# Altium PCB Amber_Main_Board.PcbDoc (part 1 of 2)
Units mm, origin at the board's own origin, x right, y up, seen from the top; angles counter-clockwise.
Board outline 90 x 23 mm, 4 copper layers (Top Layer, Power, Ground, Bottom Layer), stack 1.142 mm thick; 223 components, 97 nets, 585 pads, 378 vias.
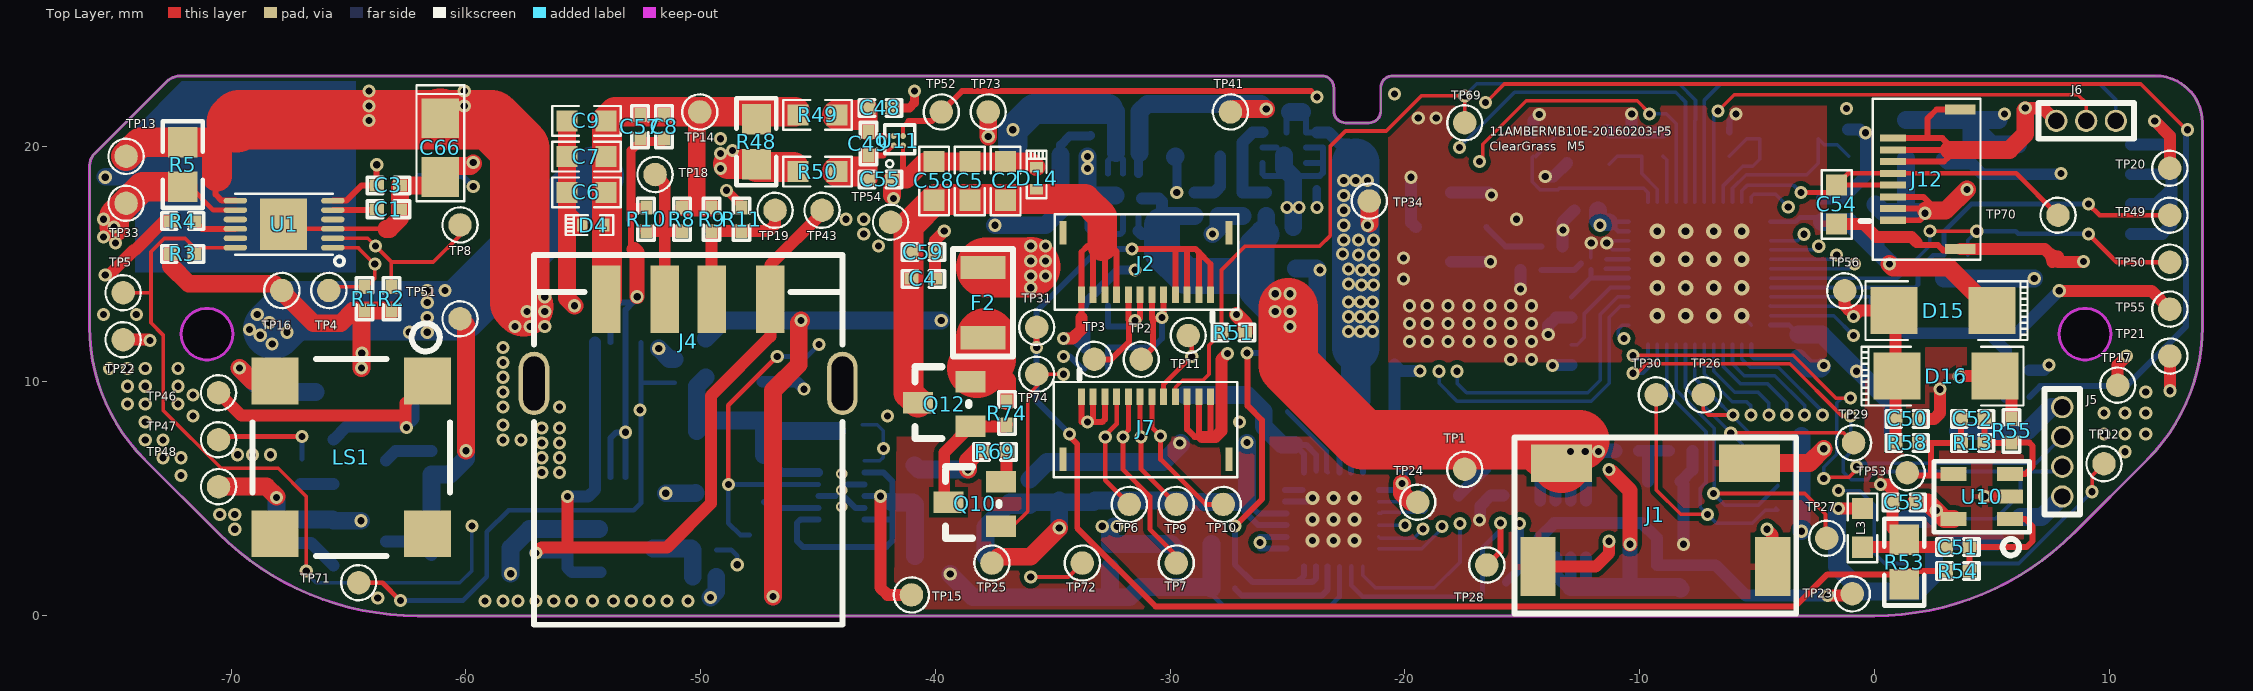
[diagram p0: Top Layer view]
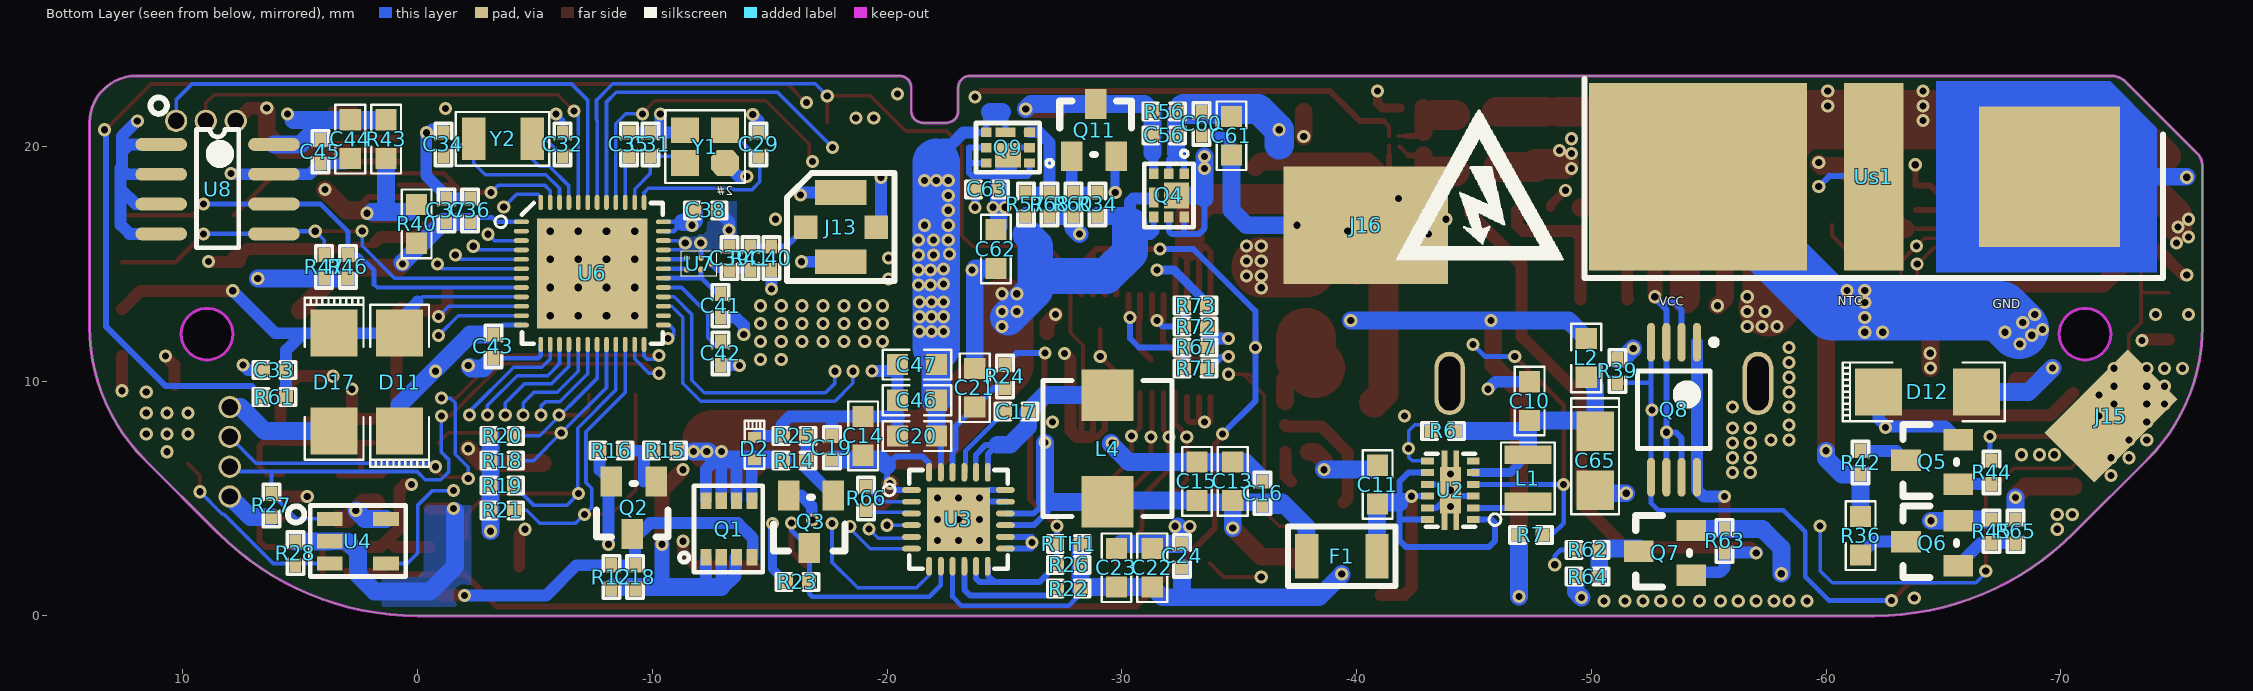
[diagram p1: Bottom Layer view, seen from below]
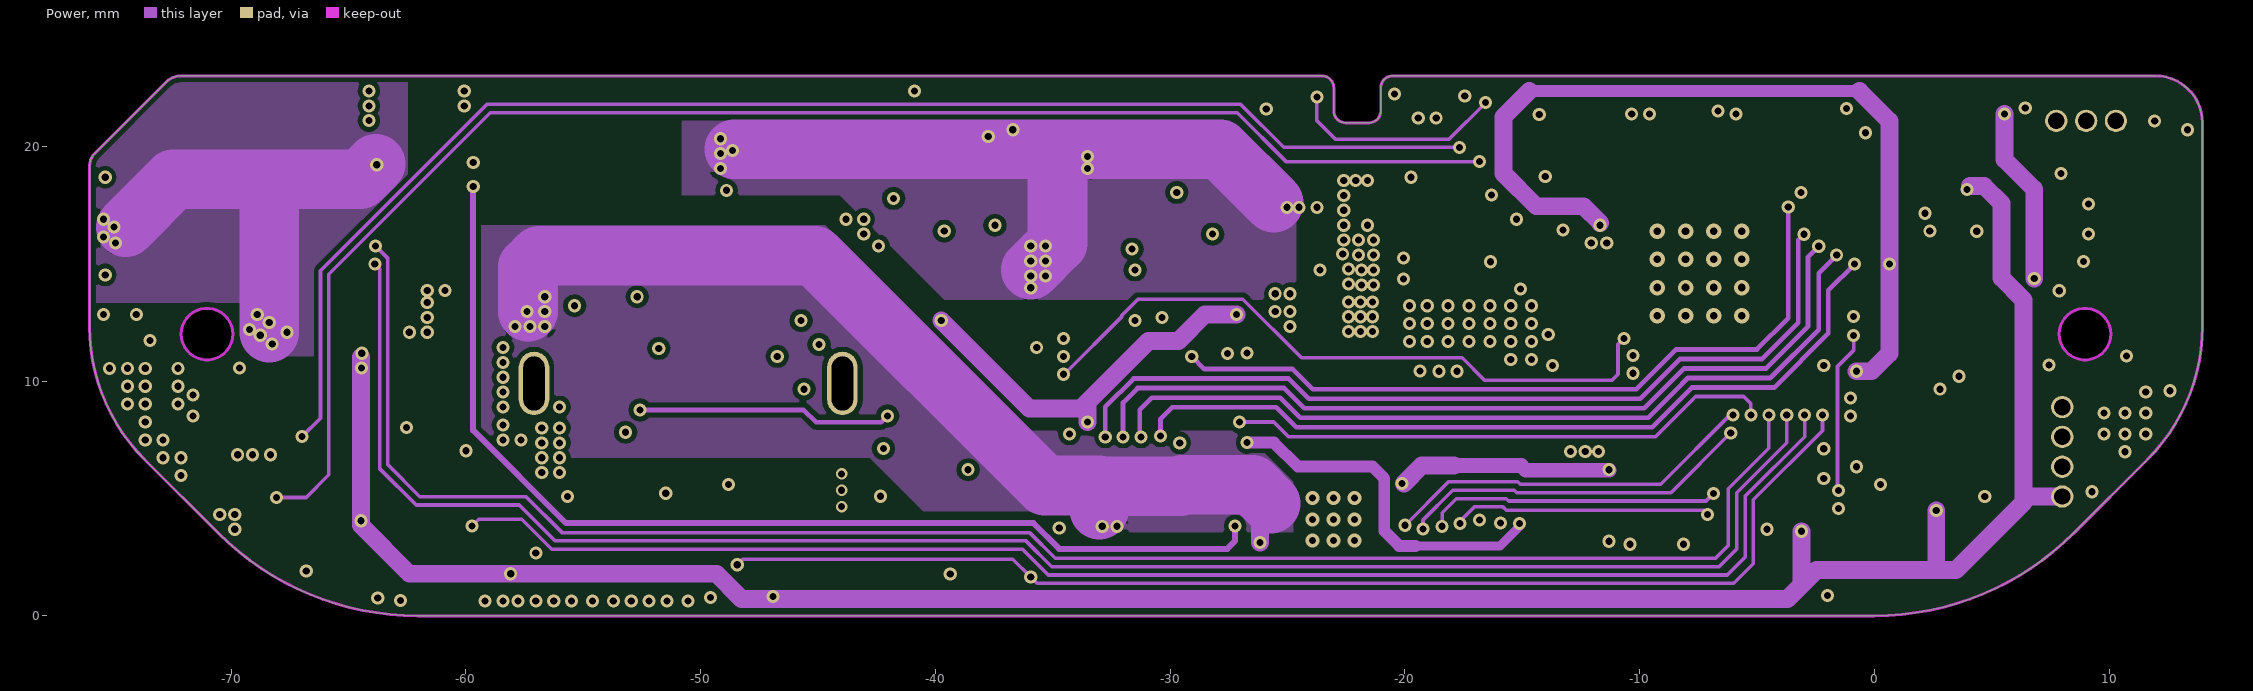
[diagram p2: Power]
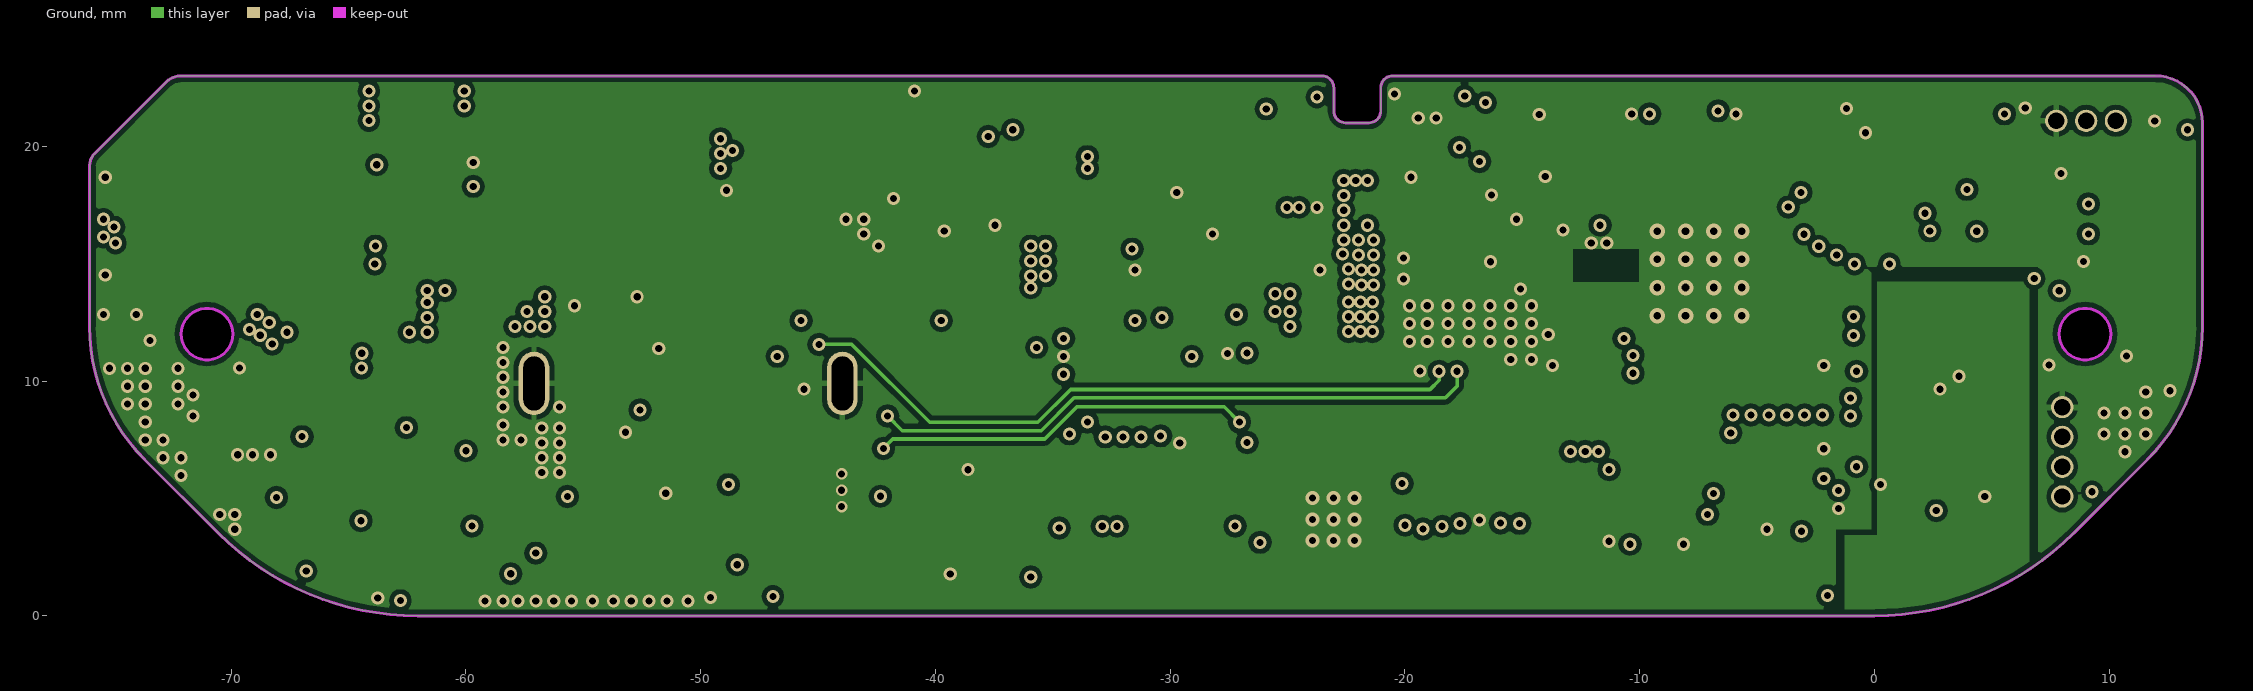
[diagram p3: Ground]
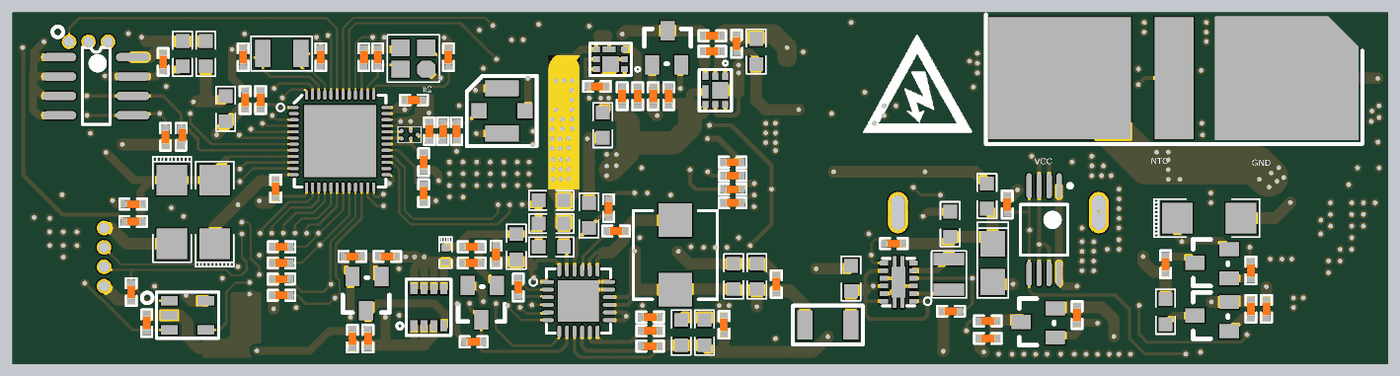
[diagram p5: 3D render of the assembled board from below, using the file's embedded part models]

## Layer stack, top to bottom
Top Layer: signal copper 0.0356
Dielectric: core 0.36, FR-4, Dk 4.8
Power: signal copper 0.0356
Dielectric: prepreg 0.32, FR-4, Dk 4.8
Ground: signal copper 0.0356
Dielectric: core 0.32, FR-4, Dk 4.8
Bottom Layer: signal copper 0.0356

## Board outline
-73.687,6.657 cw(c-68.03,12.314) -76.03,12.314 -76.03,19.177 cw(c-75.313,19.177) -75.82,19.684 -72.765,22.739 cw(c-72.136,22.111) -72.136,23 -23.53,23 cw(c-23.539,22.491) -23.03,22.482 -23.03,22.5 -23.03,21.5 ccw(c-22.53,21.5) -22.53,21 -21.53,21 ccw(c-21.53,21.5) -21.03,21.5 -21.03,22.5 cw(c-20.521,22.491) -20.512,23 11.97,23 cw(c11.97,21) 13.97,21 13.97,12.314 13.97,12.313 cw(c5.97,12.313) 11.627,6.657 8.485,3.515 cw(c0,12) 0,0 -62.06,0 cw(c-62.06,12) -70.545,3.515
cut-out: -71.03,10.9 cw(c-71.03,12) -72.13,12 cw(c-71.03,12) -71.03,13.1 cw(c-71.03,12) -69.93,12 cw(c-71.03,12)
cut-out: 8.97,10.9 cw(c8.97,12) 7.87,12 cw(c8.97,12) 8.97,13.1 cw(c8.97,12) 10.07,12 cw(c8.97,12)
cut-out: -71.03,10.9 cw(c-71.03,12) -72.13,12 cw(c-71.03,12) -71.03,13.1 cw(c-71.03,12) -69.93,12 cw(c-71.03,12)

## Design rules (kind name [scope] priority, off if disabled: settings)
Clearance [All] p1: gap=0.203
HoleSize [All] p1: absolutevalues=TRUE maxlimit=5.08 minlimit=0.025 maxpercent=80.000 minpercent=20.000
HoleToHoleClearance [All] p1 off: gap=0.254 allowstackedmicrovias=TRUE
MinimumSolderMaskSliver [All] p1: minsoldermaskwidth=0
PolygonConnect PolygonConnect_1 [IsVia] p1: connectstyle=Direct reliefconductorwidth=0.254 reliefentries=4 polygonreliefangle="90 Angle"
PolygonConnect [All] p2: connectstyle=Relief reliefconductorwidth=0.254 reliefentries=4 polygonreliefangle="90 Angle"
RoutingVias [All] p1: holewidth=0.711 width=1.27 viastyle="Through Hole" minholewidth=0.711 minwidth=1.27 maxholewidth=0.711 maxwidth=1.27
SilkToSilkClearance [All] p1: silktosilkclearance=0
SilkscreenOverComponentPads [All] p1: minsilkscreentomaskgap=0
SolderMaskExpansion [All] p1: expansion=0.102
Width [All] p1: maxlimit=5.08 minlimit=0.152 preferedwidth=0.254
23 further rules are at their usual default settings.

## Classes and differential pairs
component class "Breath LED,Temp,Touch key,Motor": C48 C49 C51 C52 C53 C54 C55 D12 F2 J7 J12 J15 J16 LS1 Q5 Q6 Q10 Q12 R13 R36 R42 R44 R45 R48 R49 R50 R51 R53 R54 R55 R65 R69 R74 TP6 TP7 TP9 TP10 TP11 TP46 TP47 TP48 TP51 TP52 TP53 TP69 TP70 TP74 U10 U11
component class "Charge,Discharge,Battery Monitor,DC DC BUCK": C1 C2 C3 C4 C5 C6 C7 C8 C9 C57 C58 C59 C65 C66 D2 D4 D14 J1 J2 J4 L1 L2 Q7 Q8 R1 R2 R3 R4 R5 R6 R7 R8 R9 R10 R11 R39 R62 R63 R64 R67 R71 R72 R73 TP1 TP2 TP3 TP4 TP5 TP8 TP13 TP14 TP15 TP16 TP17 TP18 TP19 TP20 TP21 TP22 TP31 TP33 TP43 TP54 TP71 TP72 U1 U2 Us1
component class "BLE MCU,Watch Dog and Reset,EEPROM,Buzzer": A1 C28 C29 C31 C32 C33 C34 C35 C36 C37 C38 C39 C40 C41 C42 C43 C44 C45 C50 D9 D11 D15 D16 D17 J5 J6 J13 L3 R27 R28 R40 R41 R43 R46 R47 R58 R61 TP12 TP49 TP50 TP55 TP56 U4 U6 U7 U8 Y1 Y2
component class "Management of Charging,Discharging,Tri-axis angle sensor": C13 C14 C15 C16 C17 C18 C19 C20 C21 C22 C23 C24 C46 C47 F1 L4 Q1 Q2 Q3 R9 R11 R15 R16 R18 R19 R20 R21 R22 R23 R24 R25 R26 R66 RTH1 Text TP23 TP24 TP25 TP26 TP27 TP28 TP29 TP30 TP34 U3
component class WindCharger: C56 C60 C61 C62 C63 Q4 Q9 Q11 R34 R56 R57 R60 R68 TP41 TP73

## Components (designator, comment, footprint, x,y, rotation, side; value= is the part's Value field where it differs from the comment)
C1 "0.47uF/10V/X7R/10%" 0402C -63.3,17.317 r0 top
C2 "22uF/10V/X5R/20%" 0603C -37.011,18.523 r90 top
C3 "1uF/10V/X7R/10%" 0402C -63.3,18.333 r0 top
C4 "0.1uF/10V/X7R/10%" 0402C -40.513,14.351 r0 top
C5 "22uF/10V/X5R/20%" 0603C -38.535,18.523 r90 top
C6 "22uF/10V/X5R/20%" 0603C -54.864,18.034 r180 top
C7 "22uF/10V/X5R/20%" 0603C -54.864,19.558 r180 top
C8 "0.1uF/10V/X7R/10%" 0402C -51.562,20.828 r270 top
C9 "22uF/10V/X5R/20%" 0603C -54.864,21.082 r180 top
C10 "10uF/10V/X7R/10%" 0603C -47.371,9.144 r90 bottom
C11 "10uF/10V/X7R/10%" 0603C -40.894,5.588 r90 bottom
C13 "10uF/10V/X7R/10%" 0603C -34.725,5.728 r90 bottom
C14 "10uF/10V/X7R/10%" 0603C -18.977,7.665 r90 bottom
C15 "10uF/10V/X7R/10%" 0603C -33.201,5.728 r90 bottom
C16 "0.1uF/10V/X7R/10%" 0402C -35.995,5.22 r90 bottom
C17 "47nF/10V/X7R/10%" 0402C -25.513,8.697 r0 bottom
C18 "1nF/10V/X7R/5%" 0402C -9.271,1.651 r270 bottom
C19 "1uF/10V/X7R/10%" 0402C -17.653,7.157 r90 bottom
C20 "22uF/10V/X5R/20%" 0603C -21.273,7.654 r0 bottom
C21 "4.7uF/10V/X7R/10%" 0603C -23.736,9.713 r90 bottom
C22 "22uF/10V/X5R/20%" 0603C -31.296,2.045 r270 bottom
C23 "22uF/10V/X5R/20%" 0603C -29.772,2.045 r270 bottom
C24 "0.1uF/10V/X7R/10%" 0402C -32.566,2.553 r270 bottom
C29 "12pF/16V/NPO/10%" 0402C -14.532,20.079 r270 bottom
C31 "12pF/16V/NPO/10%" 0402C -9.913,20.079 r270 bottom
C32 "12pF/16V/NPO/10%" 0402C -6.18,20.079 r270 bottom
C33 "0.1uF/10V/X7R/10%" 0402C 6.096,10.459 r0 bottom
C34 "12pF/16V/NPO/10%" 0402C -1.1,20.079 r270 bottom
C35 "0.1uF/10V/X7R/10%" 0402C -9.006,20.079 r270 bottom
C36 "0.1uF/10V/X7R/10%" 0402C -2.243,17.267 r270 bottom
C37 "1uF/10V/X7R/10%" 0402C -1.227,17.267 r270 bottom
C38 "1nF/10V/X7R/5%" 0402C -12.276,17.267 r0 bottom
C39 "1PF/10V/NPO/10%" 0402C -13.292,15.235 r90 bottom
C40 "DNM" 0402C -15.07,15.235 r270 bottom
C41 "2.2nF/10V/X7R/10%" 0402C -12.911,13.203 r90 bottom
C42 "47nF/10V/X7R/10%" 0402C -12.911,11.176 r90 bottom
C43 "0.1uF/10V/X7R/10%" 0402C -3.229,11.475 r90 bottom
C44 "10uF/10V/X7R/10%" 0603C 2.87,20.301 r270 bottom
C45 "0.1uF/10V/X7R/10%" 0402C 4.137,19.766 r270 bottom
C46 "22uF/10V/X5R/20%" 0603C -21.273,9.178 r0 bottom
C47 "22uF/10V/X5R/20%" 0603C -21.273,10.702 r0 bottom
C48 "0.1uF/10V/X7R/10%" 0402C -42.345,21.635 r180 top
C49 "1uF/10V/X7R/10%" 0402C -42.853,20.111 r270 top
C50 "0.1uF/10V/X7R/10%" 0402C 1.397,8.382 r0 top
C51 "1uF/10V/X7R/10%" 0402C 3.556,2.921 r0 top
C52 "1uF/10V/X7R/10%" 0402C 4.191,8.382 r180 top
C53 "1uF/10V/X7R/10%" 0402C 1.27,4.826 r0 top
C54 "10uF/10V/X7R/10%" 0603C -1.608,17.521 r270 top
C55 "0.1uF/10V/X7R/10%" 0402C -42.345,18.587 r0 top
C56 "1nF/10V/X7R/5%" 0402C -31.804,20.46 r180 bottom
C57 "0.1uF/10V/X7R/10%" 0402C -52.578,20.828 r270 top
C58 "22uF/10V/X5R/20%" 0603C -40.059,18.523 r90 top
C59 "0.1uF/10V/X7R/10%" 0402C -40.513,15.494 r0 top
C60 "1uF/10V/X7R/10%" 0402C -33.401,20.955 r270 bottom
C61 "10uF/10V/X7R/10%" 0603C -34.671,20.447 r270 bottom
C62 "10uF/10V/X7R/10%" 0603C -24.638,15.621 r270 bottom
C63 "1uF/10V/X7R/10%" 0402C -24.257,18.161 r0 bottom
C65 "220uF/6.3V" 3216 -50.165,6.604 r270 bottom
C66 "220uF/6.3V" 3216 -61.087,19.939 r270 top
D2 "VMNZC6.8CST2RA" 0402 -14.351,6.649 r90 bottom
D4 "VMNZC6.8CST2RA" 0402 -54.102,16.637 r180 top
D11 "RB160MM-30TR" DO-214AC 0.762,9.951 r270 bottom
D12 "RB160MM-30TR" DO-214AC -64.316,9.538 r0 bottom
D14 "VMNZC6.8CST2RA" 0402 -35.687,18.161 r90 top
D15 "RB160MM-30TR" DO-214AC 2.921,12.999 r0 top
D16 "RB160MM-30TR" DO-214AC 3.048,10.205 r180 top
D17 "RB160MM-30TR" DO-214AC 3.556,9.951 r90 bottom
F1 "250MA" 1206 -39.37,2.54 r180 bottom
F2 "500MA" 1206 -37.973,13.335 r270 top
J1 "MICRO_USB_B" MICRO-USB-AVX-PAD -9.33,4.3 r180 top locked
J2 "PoGo Pin Connector" FPC_CON12-BACK-MOLEX -31.03,15 r270 top locked
J4 "USB_A" USB_A_FCI -50.53,11.687 r270 top locked
J5 "Program" "PROGRAM - 1.27" 8.001,6.985 r90 top
J6 "Debug" "Debug- 1.27" 8.382,21.082 r180 top
J7 "Connector" FPC_CON12-BACK-MOLEX -31.03,8 r90 top locked
J12 "Hall Connector" FPC_CON8-KYOCERA 2.23,18.598 r180 top locked
J13 "IPEX" IPEX -18.034,16.555 r270 bottom locked
J15 "PAD1" PAD1 25.389,4.272 r180 bottom
J16 "PAD2" PAD2 21.844,-4.191 r180 bottom
L1 "1239AS-H-2R2M" 2520-TOKO -47.298,5.855 r90 bottom
L2 "BLM18AG601SN1" 0603R -49.784,10.16 r90 bottom
L3 "BLM18AG601SN1" 0603R -0.508,2.921 r90 top
L4 "2.2uH" MMD -29.391,7.125 r270 bottom
LS1 "Buzzle" "BUZZER 7525" -64.886,6.744 r90 top
Q1 "RQ1E050RPTR" TSMT8 -13.262,3.696 r90 bottom
Q2 "RK7002BMT116" SOT23 -10.16,5.715 r0 bottom
Q3 "RK7002BMT116" SOT23 -17.707,5.125 r0 bottom
Q4 "CSD25310Q2" DQK -32.004,17.907 r0 bottom
Q5 "2SA1036KT146R" SMT3 -65.633,5.601 r90 bottom
Q6 "RRR030P03TL" TSMT3 -64.516,3.093 r90 bottom
Q7 "RRR030P03TL" TSMT3 -53.14,2.68 r90 bottom
Q8 "GM8205A" TSSOP-8 -53.521,8.776 r270 bottom
Q9 "CSD25310Q2" DQK -25.146,19.939 r90 bottom
Q10 "RK7002BMT116" SOT23 -37.211,3.81 r90 top
Q11 "RK7002BMT116" SOT23 -27.867,19.571 r180 bottom
Q12 "RRR030P03TL" TSMT3 -39.624,9.017 r90 top
R1 "4.7K/1%" 0402R -64.316,13.507 r270 top
R2 "4.7K/1%" 0402R -63.173,13.507 r270 top
R3 "10K/1%" 0402R -72.063,15.412 r180 top
R4 "10K/1%" 0402R -72.063,16.809 r0 top
R5 "0.01R/1%" 0805 -72.063,19.222 r90 top
R6 "1M/1%" 0402R -43.688,7.874 r180 bottom
R7 "100K/1%" 0402R -47.425,3.442 r0 bottom
R8 "75K" 0402R -50.8,16.891 r270 top
R9 "43K" 0402R -49.53,16.891 r270 top
R10 "51K" 0402R -52.324,16.891 r90 top
R11 "51K" 0402R -48.26,16.891 r90 top
R12 "10K/1%" 0402R -8.255,1.651 r270 bottom
R13 "20K/1%" 0402R 4.191,7.366 r180 top
R14 "121K/1%" 0402R -16.056,6.604 r0 bottom
R15 "262K/1%" 0402R -10.541,7.03 r180 bottom
R16 "180K/1%" 0402R -8.255,7.03 r180 bottom
R18 "10K/1%" 0402R -3.61,6.606 r180 bottom
R19 "10K/1%" 0402R -3.61,5.548 r180 bottom
R20 "10K/1%" 0402R -3.61,7.665 r180 bottom
R21 "10K/1%" 0402R -3.61,4.49 r180 bottom
R22 "332R/1%" 0402R -27.74,1.156 r0 bottom
R23 "100K/1%" 0402R -16.183,1.442 r0 bottom
R24 "5.49K/1%" 0402R -25.019,10.194 r90 bottom
R25 "82K/1%" 0402R -16.056,7.665 r180 bottom
R26 "30.9K/1%" 0402R -27.74,2.172 r180 bottom
R27 "10K/1%" 0402R 6.223,4.699 r90 bottom
R28 "63K/1%" 0402R 5.207,2.667 r90 bottom
R34 "262K/1%" 0402R -28.956,17.526 r270 bottom
R36 "0R/1%" 0603R -61.468,4.236 r270 bottom
R39 "1M/1%" 0402R -51.108,10.427 r90 bottom
R40 "0R/1%" 0603R 0.043,17.521 r270 bottom
R41 "0R/1%" 0402R -14.181,15.235 r270 bottom
R42 "0R/1%" 0402R -61.468,6.522 r90 bottom
R43 "0R/1%" 0603R 1.343,21.127 r270 bottom
R44 "1K/1%" 0402R -67.056,6.109 r90 bottom
R45 "100K/1%" 0402R -67.056,3.601 r270 bottom
R46 "4.7K/1%" 0402R 2.964,14.862 r270 bottom
R47 "4.7K/1%" 0402R 3.98,14.862 r270 bottom
R48 "10mR/1%" 0805 -47.625,20.193 r90 top
R49 "0R" 0603R -45.847,21.336 r0 top
R50 "0R" 0603R -45.847,18.923 r0 top
R51 "10K/1%" 0402R -27.305,12.065 r180 top
R53 "50mR/1%" 0805 1.27,2.286 r270 top
R54 "1K/1%" 0402R 3.556,1.905 r0 top
R55 "1K/1%" 0402R 5.842,7.874 r90 top
R56 "10K/1%" 0402R -31.804,21.476 r180 bottom
R57 "0R/1%" 0402R -25.908,17.526 r270 bottom
R58 "1K/1%" 0402R 1.397,7.366 r180 top
R60 "180K/1%" 0402R -27.94,17.526 r90 bottom
R61 "0R/1%" 0402R 6.096,9.316 r180 bottom
R62 "0R/1%" 0402R -49.838,2.807 r180 bottom
R63 "100K/1%" 0402R -55.68,3.188 r270 bottom
R64 "1M/1%" 0402R -49.838,1.664 r180 bottom
R65 "1K/1%" 0402R -68.072,3.601 r90 bottom
R66 "200R/1%" 0402R -19.104,4.998 r270 bottom
R67 "75K" 0402R -33.139,11.43 r0 bottom
R68 "1M/1%" 0402R -26.924,17.526 r90 bottom
R69 "10K" 0402R -37.465,6.985 r0 top
R71 "51K" 0402R -33.139,10.541 r180 bottom
R72 "43K" 0402R -33.139,12.319 r0 bottom
R73 "51K" 0402R -33.139,13.208 r180 bottom
R74 "549K" 0402R -36.957,8.636 r270 top
RTH1 "10K/1%" 0402R -27.74,3.061 r180 bottom
TP1 "TEST" "TEST PAD" -17.453,6.236 r90 top
TP2 "TEST" "Test Pad" -31.233,10.922 r90 top
TP3 "TEST" "Test Pad" -33.233,10.922 r90 top
TP4 "TEST" "TEST PAD" -65.84,13.856 r90 top
TP5 "TEST" "TEST PAD" -74.603,13.761 r90 top
TP6 "TEST" "Test Pad" -31.74,4.744 r90 top
TP7 "TEST" "Test Pad" -29.74,2.244 r90 top
TP8 "TEST" "TEST PAD" -60.252,16.65 r90 top
TP9 "TEST" "Test Pad" -29.74,4.744 r90 top
TP10 "TEST" "Test Pad" -27.74,4.744 r90 top
TP11 "TEST" "Test Pad" -29.233,11.938 r90 top
TP12 "TEST" "Test Pad" 9.779,6.477 r90 top
TP13 "TEST" "TEST PAD" -74.476,19.571 r90 top
TP14 "TEST" "TEST PAD" -50.038,21.463 r90 top
TP15 "TEST" "TEST PAD" -41.021,0.889 r90 top
TP16 "TEST" "TEST PAD" -67.84,13.856 r90 top
TP17 "TEST" "TEST PAD" 10.36,9.824 r0 top
TP18 "TEST" "TEST PAD" -51.943,18.796 r90 top
TP19 "TEST" "TEST PAD" -46.831,17.272 r90 top
TP20 "TEST" "TEST PAD" 12.584,19.063 r90 top
TP21 "TEST" "TEST PAD" 12.584,11.063 r90 top
TP22 "TEST" "TEST PAD" -74.603,11.761 r90 top
TP23 "TEST" "TEST PAD" -0.943,0.934 r90 top
TP24 "TEST" "TEST PAD" -19.453,4.839 r90 top
TP25 "TEST" "TEST PAD" -37.592,2.244 r90 top
TP26 "TEST" "TEST PAD" -7.293,9.411 r90 top
TP27 "TEST" "TEST PAD" -2.032,3.302 r90 top
TP28 "TEST" "TEST PAD" -16.51,2.159 r90 top
TP29 "TEST" "TEST PAD" -0.889,7.366 r90 top
TP30 "TEST" "TEST PAD" -9.293,9.411 r90 top
TP31 "TEST" "TEST PAD" -35.687,12.287 r90 top
TP33 "TEST" "Test Pad" -74.476,17.571 r90 top
TP34 "TEST" "TEST PAD" -21.517,17.666 r90 top (schematic designator TP16)
TP41 "TEST" "TEST PAD" -27.432,21.463 r0 top
TP43 "TEST" "TEST PAD" -44.831,17.272 r90 top
TP46 "TEST" "TEST PAD" -70.539,9.5 r90 top
TP47 "TEST" "TEST PAD" -70.539,7.5 r90 top
TP48 "TEST" "TEST PAD" -70.539,5.5 r90 top
TP49 "TEST" "TEST PAD" 12.584,17.063 r90 top
TP50 "TEST" "TEST PAD" 12.584,15.063 r90 top
TP51 "TEST" "TEST PAD" -60.252,12.65 r90 top
TP52 "TEST" "TEST PAD" -39.751,21.463 r90 top
TP53 "TEST" "Test Pad" 1.397,6.096 r90 top
TP54 "TEST" "Test Pad" -41.91,16.764 r90 top
TP55 "TEST" "Test Pad" 12.584,13.063 r90 top
TP56 "TEST" "Test Pad" -1.27,13.843 r90 top
TP69 "TEST" "Test Pad" -17.453,21 r90 top
TP70 "TEST" "Test Pad" 7.82,17.063 r90 top
TP71 "TEST" "Test Pad" -64.57,1.41 r90 top
TP72 "TEST" "Test Pad" -33.74,2.244 r90 top
TP73 "TEST" "Test Pad" -37.751,21.463 r90 top
TP74 "TEST" "Test Pad" -35.687,10.287 r90 top
U1 "BQ27441DRZR-G1A" DRZ -67.745,16.682 r180 top
U2 "TPS62740DSSR" DSS -43.996,5.347 r0 bottom
U3 "BQ24195RGER" RGE -23.041,4.109 r180 bottom
U4 "STWD100YNYWY3F" SOT23-5 2.54,3.175 r180 bottom
U6 "nRF51822QFAA" QFN48 -7.447,14.583 r180 bottom
U7 "BAL-NRF01D3" ECOPACK -11.992,14.999 r180 bottom
U8 "M24C64R-D RMN6TP/P" SO8N 8.52,18.174 r180 bottom
U10 "LMV321IDBVR" SOT23-5 4.572,5.08 r180 top
U11 "INA216A3YFFR" YFF -41.583,20.238 r90 top
Us1 "PL605798P" BATTERY -62.03,18.7 r180 bottom locked
Y1 "16M" XTALSMD2-2520 -12.246,19.984 r180 bottom
Y2 "32.768K" XTALSMD2-3215 -3.64,20.315 r180 bottom

## Footprints (in the part's own frame and the unit in brackets; to place one, negate y for a bottom-side part, rotate by r counter-clockwise, add the part's x,y. Pads: shape width x height; smd on the part's side, far side on the other; paste and mask are expansions set on the pad)
0402 [mm]
  rect 0.45x0.55 smd: 1(0.95,0) 2(0,0)
  silkscreen extent -0.38,-0.42 1.65,0.42
0402C [mm]
  rect 0.6x0.5 smd: 1(-0.5,0) 2(0.5,0)
  silkscreen extent -0.9,-0.35 0.9,0.35, body extent -0.51,-0.25 0.51,0.25, height 0.5
0402R [mm]
  rect 0.6x0.5 smd: 1(-0.5,0) 2(0.5,0)
  silkscreen extent -0.9,-0.35 0.9,0.35, body extent -0.51,-0.25 0.51,0.25, height 0.5
0603C [mm]
  rect 0.9x0.9 smd: 1(-0.826,0) 2(0.826,0)
  silkscreen extent -1.46,-0.64 1.46,0.64, body extent -1.38,-0.55 1.38,0.55, height 0.9
0603R [mm]
  rect 0.9x0.9 smd: 1(0,0) 2(1.651,0)
  silkscreen extent -0.64,-0.64 2.29,0.64, body extent -0.55,-0.55 2.2,0.55, height 0.5
0805 [mm]
  rect 1.3x1.25 smd: 1(-0.95,0) 2(0.95,0)
  silkscreen extent -1.85,-0.85 1.85,0.85, body extent -1.7,-0.73 1.7,0.73, height 0.6
1206 [mm]
  rect 1x1.9 smd: 1(1.5,0) 2(-1.5,0)
  silkscreen extent -2.29,-1.27 2.29,1.27, body extent -2.43,-1.2 2.48,1.2, height 1.4
2520-TOKO [mm]
  rect 0.8x2 smd: 1(-1,0) 2(1,0)
  silkscreen extent -1.52,-1.14 1.52,1.14, body extent -1.5,-1.1 1.5,1.1, height 1.2
3216 [mm]
  rect 1.7x1.6 smd: 1(-1.256,0) 2(1.256,0)
  silkscreen extent -2.67,-1.02 2.29,1.02, body extent -1.72,-0.85 1.72,0.85, height 1.8
BATTERY [mm]
  rect 9.3x8 smd: 1(-7.485,0)
  rect 2.54x8 smd: 2(0,0)
  rect 6x6 smd: 3(7.485,0)
  Top Layer region: 2.667,-4.064 12.065,-4.064 12.065,2.064 10.065,4.064 2.667,4.064
"BUZZER 7525" [mm]
  rect 2x2 smd: 1(3.25,-3.25) 2(3.25,3.25) 3(-3.25,3.25) 4(-3.25,-3.25)
  silkscreen extent -4.2,-4.2 5.71,4.2, body extent -4.35,-4.35 4.35,4.35, height 2.5
"Debug- 1.27" [mm]
  round 0.95 hole 0.7: 1(-1.905,0) 2(-0.635,0) 3(0.635,0)
  silkscreen extent -2.67,-0.76 1.4,0.76, body extent -2.48,-0.58 1.21,0.58
DO-214AC [mm]
  rect 2x2 smd: 1(2.085,0) 2(-2.085,0)
  silkscreen extent -3.3,-1.25 3.6,1.25, body extent -3.19,-1.1 3.19,1.1, height 2.2
DQK [mm]
  rect 0.4x0.455 smd: 1(-0.65,-0.923) 2(0,-0.923) 3(0.65,-0.923) 4(0.65,0.923) 5(0,0.923) 6(-0.65,0.923)
  rect 1.05x1.1 smd: 7(-0.325,0)
  rect 0.4x0.85 smd: 8(0.65,0.096)
  silkscreen extent -1.05,-1.93 1.05,1.35, body extent -0.95,-1.25 0.95,1.25, height 0.8
DRZ [mm]
  oval 1x0.24 smd: 1(-2.075,1) 2(-2.075,0.6) 3(-2.075,0.2) 4(-2.075,-0.2) 5(-2.075,-0.6) 6(-2.075,-1) 7(2.075,-1) 8(2.075,-0.6) 9(2.075,-0.2) 10(2.075,0.2) 11(2.075,0.6) 12(2.075,1)
  rect 2x2.2 smd: 13(0.025,0)
  silkscreen extent -2.56,-1.3 2.08,1.77, body extent -2.68,-1.24 2.68,1.24, height 1
DSS [mm]
  rect 0.55x0.3 smd: 1(-0.975,1.25) 2(-0.975,0.75) 3(-0.975,0.25) 4(-0.975,-0.25) 5(-0.975,-0.75) 6(-0.975,-1.25) 7(0.975,-1.25) 8(0.975,-0.75) 9(0.975,-0.25) 10(0.975,0.25) 11(0.975,0.75) 12(0.975,1.25)
  rect 0.9x2 smd: 13(0,0)
  rect 0.25x0.7 smd: 14(-0.25,-1.35) 15(0.25,-1.35) 16(-0.25,1.35) 17(0.25,1.35)
  silkscreen extent -2.15,-1.55 1.05,1.55, body extent -1.05,-1.55 1.05,1.55, height 0.8
ECOPACK [mm]
  round 0.26 smd: 1(-0.516,-0.25) 2(-0.516,0.25) 3(0.083,-0.25) 4(0.083,0.25) 5(0.517,0)
  silkscreen extent -0.76,-0.53 0.76,0.53, body extent -0.75,-0.48 0.75,0.48, height 0.69
FPC_CON8-KYOCERA [mm]
  rect 1.1x0.3 smd: 1(1.435,1.75) 2(1.435,1.25) 3(1.435,0.75) 4(1.435,0.25) 5(1.435,-0.25) 6(1.435,-0.75) 7(1.435,-1.25) 8(1.435,-1.75)
  rect 1.3x0.42 smd: 9(-1.435,2.97) 10(-1.435,-2.97)
  silkscreen extent -2.29,-3.43 2.83,3.43, body extent -2.19,-3.28 2.09,3.28, height 1
FPC_CON12-BACK-MOLEX [mm]
  rect 0.7x0.3 smd: 1(1.325,2.75) 2(1.325,2.25) 3(1.325,1.75) 4(1.325,1.25) 5(1.325,0.75) 6(1.325,0.25) 7(1.325,-0.25) 8(1.325,-0.75) 9(1.325,-1.25) 10(1.325,-1.75) 11(1.325,-2.25) 12(1.325,-2.75)
  rect 1x0.3 smd: 13(-1.325,3.54) 14(-1.325,-3.54)
  silkscreen extent -2.1,-3.89 2.47,3.94, body extent -1.93,-3.79 1.78,3.79, height 1
IPEX [mm]
  rect 1x1 smd: 1(0,-1.5) 3(0,1.5)
  rect 1.05x2.2 smd: 2(-1.475,0) 4(1.475,0)
  silkscreen extent -2.3,-2.3 2.3,2.29, body extent -2.1,-2.1 2.1,2.1, height 1.25
MICRO-USB-AVX-PAD [mm]
  rect 2.6x1.6 smd: 1(4,-2.203) 2(-4,-2.203)
  rect 1.5x2.5 smd: 3(-5,2.204) 4(5,2.204)
  silkscreen extent -6,-3.3 6,4.2, body extent -5.9,-3.15 5.9,4.01, height 3.9
MMD [mm]
  rect 2.2x2.2 smd: 1(-2.275,0) 2(2.275,0)
  silkscreen extent -2.9,-2.75 2.9,2.75, body extent -2.87,-2.72 2.87,2.72, height 1.8
PAD1 [mm]
  rect 3x5 smd rot 135: 1(97.525,4.237)
PAD2 [mm]
  rect 7x5 smd: 2(62.23,20.828)
"PROGRAM - 1.27" [mm]
  round 0.95 hole 0.7: 1(-1.905,0) 2(-0.635,0) 3(0.635,0) 4(1.905,0)
  silkscreen extent -2.67,-0.76 2.67,0.76, body extent -2.48,-0.58 2.48,0.58
QFN48 [mm]
  oval 0.65x0.2 smd: 1(-3.025,2.2) 2(-3.025,1.8) 3(-3.025,1.4) 4(-3.025,1) 5(-3.025,0.6) 6(-3.025,0.2) 7(-3.025,-0.2) 8(-3.025,-0.6) 9(-3.025,-1) 10(-3.025,-1.4) 11(-3.025,-1.8) 12(-3.025,-2.2) 25(3.025,-2.2) 26(3.025,-1.8) 27(3.025,-1.4) 28(3.025,-1) 29(3.025,-0.6) 30(3.025,-0.2) 31(3.025,0.2) 32(3.025,0.6) 33(3.025,1) 34(3.025,1.4) 35(3.025,1.8) 36(3.025,2.2)
  oval 0.2x0.65 smd: 13(-2.2,-3.025) 14(-1.8,-3.025) 15(-1.4,-3.025) 16(-1,-3.025) 17(-0.6,-3.025) 18(-0.2,-3.025) 19(0.2,-3.025) 20(0.6,-3.025) 21(1,-3.025) 22(1.4,-3.025) 23(1.8,-3.025) 24(2.2,-3.025) 37(2.2,3.025) 38(1.8,3.025) 39(1.4,3.025) 40(1,3.025) 41(0.6,3.025) 42(0.2,3.025) 43(-0.2,3.025) 44(-0.6,3.025) 45(-1,3.025) 46(-1.4,3.025) 47(-1.8,3.025) 48(-2.2,3.025)
  rect 4.7x4.7 smd: 49(0,0)
  silkscreen extent -4.15,-3 3,3, body extent -3,-3 3,3, height 0.9
RGE [mm]
  oval 0.8x0.25 smd: 1(-2,1.25) 2(-2,0.75) 3(-2,0.25) 4(-2,-0.25) 5(-2,-0.75) 6(-2,-1.25) 13(2,-1.25) 14(2,-0.75) 15(2,-0.25) 16(2,0.25) 17(2,0.75) 18(2,1.25)
  oval 0.25x0.8 smd: 7(-1.25,-2) 8(-0.75,-2) 9(-0.25,-2) 10(0.25,-2) 11(0.75,-2) 12(1.25,-2) 19(1.25,2) 20(0.75,2) 21(0.25,2) 22(-0.25,2) 23(-0.75,2) 24(-1.25,2)
  rect 2.7x2.7 smd: 25(0,0)
  silkscreen extent -3.2,-2.1 2.1,2.1, body extent -2.08,-2.07 2.07,2.08, height 1
SMT3 [mil]
  rect 36x50 smd: 1(75,0) 2(0,0) 3(40,88)
  silkscreen extent -20,3 100,93, body extent -22,-29 97,117, height 37
SO8N [mm]
  oval 2.2x0.55 smd: 1(-2.4,1.905) 2(-2.4,0.635) 3(-2.4,-0.635) 4(-2.4,-1.905) 5(2.4,-1.905) 6(2.4,-0.635) 7(2.4,0.635) 8(2.4,1.905)
  silkscreen extent -2.86,-2.5 0.9,3.91, body extent -2,-2.5 2,2.5, height 1.75
SOT23 [mil]
  rect 36x50 smd: 1(75,0) 2(0,0) 3(40,88)
  silkscreen extent -20,3 100,93, body extent -22,-29 97,117, height 37
SOT23-5 [mm]
  rect 1.1x0.6 smd: 1(-1.2,0.95) 2(-1.2,0) 3(-1.2,-0.95) 4(1.2,-0.95) 5(1.2,0.95)
  silkscreen extent -2.99,-1.5 2.03,1.52, body extent -0.87,-1.5 0.87,1.5, height 1.45
"TEST PAD" [mm]
  round 1 smd: 1(0,0)
  silkscreen extent -0.75,-0.75 0.75,0.75, body extent -0.6,-0.6 0.6,0.6, height 0.1
"Test Pad" [mm]
  round 1 smd: 1(0,0)
  silkscreen extent -0.75,-0.75 0.75,0.75, body extent -0.6,-0.6 0.6,0.6, height 0.1
TSMT3 [mil]
  rect 36x50 smd: 1(-37.5,-44) 2(37.5,-44) 3(2.5,44)
  silkscreen extent -58,-41 62,49, body extent -60,-73 60,73, height 39
TSMT8 [mm]
  rect 0.7x0.47 smd: 1(-1.205,0.975) 2(-1.205,0.325) 3(-1.205,-0.325) 4(-1.205,-0.975) 5(1.205,-0.975) 6(1.205,-0.325) 7(1.205,0.325) 8(1.205,0.975)
  silkscreen extent -1.84,-1.44 1.84,2.1, body extent -1.18,-1.55 1.32,1.55, height 0.85
TSSOP-8 [mm]
  oval 1.65x0.35 smd: 1(-2.875,0.975) 2(-2.875,0.325) 3(-2.875,-0.325) 4(-2.875,-0.975) 5(2.875,-0.975) 6(2.875,-0.325) 7(2.875,0.325) 8(2.875,0.975)
  silkscreen extent -3,-1.55 1.65,1.82, body extent -2.25,-1.55 2.25,1.55, height 1.2
USB_A_FCI [mm]
  rect 2.88x1.22 smd: 1(-1.79,-3.5) 2(-1.79,-1) 3(-1.79,1) 4(-1.79,3.5)
  oval 2.7x1.3 hole 0.9 slot 2.3 at 0 deg: 5(1.79,6.57) 6(1.79,-6.57)
  silkscreen extent -3.68,-6.57 12.07,6.57, body extent -3.33,-6.5 12.09,6.5, height 7
XTALSMD2-2520 [mm]
  rect 1.2x1.1 smd: 1(-0.85,-0.7) 3(0.85,0.7) 4(-0.85,0.7)
  oct 1.2x1.1 smd: 2(0.85,-0.7)
  silkscreen extent -1.7,-1.55 1.7,1.55, body extent -1.55,-1.35 1.55,1.35, height 0.5
XTALSMD2-3215 [mm]
  rect 1x1.8 smd: 1(-1.25,0) 2(1.25,0)
  silkscreen extent -2.01,-1.14 1.98,1.14, body extent -1.85,-1 1.85,1, height 0.9
YFF [mm] "BGA, 4-Leads, Body 0.8x0.8mm,"
  round 0.25 smd: A1(-0.2,0.2) A2(0.2,0.2) B1(-0.2,-0.2) B2(0.2,-0.2)
  body extent -0.38,-0.38 0.38,0.38, height 0.63

## Part data
C1 C2 C3 C4 C5 C6 C7 C8 C9 C13 C14 C15 C16 C17 C18 C19 C20 C21 C22 C23 C24 C29 C31 C32 C33 C34 C35 C36 C37 C38 C39 C41 C42 C43 C44 C45 C46 C47 C48 C49 C50 C51 C52 C53 C54 C55 C56 C57 C58 C59 C60 C61 C62 C63: library part CAP, "厂家：M"
C10 C11: library part CAP, "厂?"
C40: library part CAP, "None"
C65 C66: library part Capacitor, "厂家"
D2 D4 D14: library part ESD_1, "厂家"
D11 D12 D15 D16 D17: library part Schottky, "厂家"
F1 F2: library part FUSE2, "厂?"
J1: library part USB_B, "³§¼Ò£"
J2: library part Po, "³§¼Ò£"
J4: "厂家："
J5 Q8: "厂?"
J6: library part Debug_1, "厂?"
J7: library part "Temp Connector", "³§¼Ò£"
J12: library part "Temp C", "³§¼"
J13: library part ANTA, "厂家"
J15 J16: "None"
L1: library part CHOKE, "厂家"
L2 L3: library part CHOKE, "厂家："
L4: library part CHOKE, "³§¼Ò£"
LS1: library part Speaker, "³§¼"
Q1: library part RQ1, "厂家"
Q2 Q3: "³§¼Ò£"
Q4 Q9 U10: "³§¼"
Q5: library part PNP, "厂家"
Q6 Q7 Q12: library part PMOS, "厂家"
Q10: "厂家"
Q11: library part RK7002, "³§¼Ò£"
R1 R2 R3 R4 R5 R7 R8 R9 R10 R11 R13 R15 R16 R18 R19 R20 R21 R22 R23 R24 R25 R26 R27 R28 R34 R46 R47 R48 R51 R53 R56 R60 R66 R67 R71 R72 R73 RTH1: library part RES1, "厂家："
R6 R36 R39 R40 R41 R42 R43 R49 R50 R54 R55 R57 R58 R61 R62 R68: library part RES1, "³§¼Ò£"
R12 R14: library part RES1, "厂?"
R44 R64 R65: library part RES, "³§¼Ò£"
R45 R63: library part RES, "厂家："
R69 R74: library part RES1
TP1 TP2 TP3 TP4 TP5 TP6 TP7 TP8 TP9 TP10 TP11 TP12 TP13 TP14 TP15 TP16 TP17 TP18 TP19 TP20 TP21 TP22 TP23 TP24 TP25 TP26 TP27 TP28 TP29 TP30 TP31 TP33 TP34 TP41 TP43 TP46 TP47 TP48 TP49 TP50 TP51 TP52 TP53 TP54 TP55 TP56 TP69 TP70 TP71 TP72 TP73: "Test Point"
U1: library part Bq27411, "厂家"
U2: library part TPS62740, "³§¼"
U3: library part BQ, "³§¼"
U4: library part STWD100, "厂家：ST"
U6: library part nRF51822, "³§¼Ò£"
U7: library part BAL-N, "³§¼"
U8: library part M2, "厂家"
U11: "厂家：TI，"
Us1: library part BAT, "厂?"
Y1: library part CR, "厂家："
Y2: library part CRYSTAL3, "厂家："

## Via types
v1: diameter 0.559, hole 0.305, Top Layer to Bottom Layer, tented both sides, 350 vias
v2: diameter 0.66, hole 0.33, Top Layer to Bottom Layer, tented both sides, 16 vias
v3: diameter 0.6, hole 0.3, Top Layer to Bottom Layer, tented both sides, 9 vias
v4: diameter 0.5, hole 0.3, Top Layer to Bottom Layer, 3 vias

## Nets (pads, with @x,y where several pads share a name; then routed paths per layer and width w, separated by ;. In a path a pad name is that pad's centre, name@x,y a point inside that pad or via, vN(x,y) a via of type N, cw(c..) or ccw(c..) an arc to the next point about the centre after c; other vN are vias at no path point)
+2.8V: C53.2 J5.1 J7.1 J7.2 J7.3 J12.1 J12.2 J12.3 L2.2 Q6.2 Q7.2 R1.2 R2.2 R3.2 R7.2 R18.1 R19.1 R20.1 R21.1 R27.1 R40.1 R43.2 R45.1 R51.1 R63.1 TP16.1 U4.5 U10.5 | length 191.7
  Top Layer w0.254: J7.1@-33.78,9.325 -33.78,8.257 -33.772,8.249 v1@-33.28,8.249 ; J7.2@-33.28,9.325 v1@-33.28,8.249 ; J7.3@-32.78,9.325 -32.78,8.368 -32.899,8.249 v1@-33.28,8.249 ; J12.1@0.795,16.848 1.937,16.848 2.348,17.259 2.359,17.27 2.359,17.571 2.082,17.848 J12.3@0.795,17.848 ; J12.2@0.795,17.348 v1@2.281,17.348
  Top Layer w0.635: v1(-27.178,12.827) -26.805,12.454 R51.1@-26.805,12.065
  Top Layer w0.762: R3.2@-72.563,15.412 -72.563,14.896 -71.809,14.142 -68.175,14.142 -66.492,12.459 -65.332,12.459 -64.784,13.007 R1.2@-64.316,13.007 ; v1(-64.443,10.554) -64.443,12.88 R1.2@-64.316,13.007 ; R2.2@-63.173,13.007 R1.2@-64.316,13.007 ; v1(-46.925,0.824) -46.925,9.59 -45.822,10.693 -45.822,12.472 v1(-45.72,12.573) ; C53.2@1.77,4.826 2.286,4.826 2.982,4.13 U10.5@3.372,4.13 ; v1@2.197,17.259 2.348,17.259 3.035,17.259 v1(3.937,18.161)
  Power w0.762: v1@-64.475,11.03 v1(-64.475,4.045) -64.475,3.854 -62.411,1.791 v1(-58.093,1.791) -49.33,1.791 -48.259,0.72 -3.697,0.72 -3.102,1.315 ; v1(-39.751,12.573) -36.004,8.827 -33.805,8.827 -33.528,9.104 ; v1(-33.528,8.255) -33.528,9.104 ; v1(-27.178,12.827) -28.526,12.827 -29.644,11.709 -30.923,11.709 -33.528,9.104 ; v1(-3.102,3.601) -3.102,1.315 ; v1(2.634,4.478) 2.634,2.044 2.54,1.95 ; v1@4.077,18.301 4.677,18.301 5.407,17.571 5.407,14.396 6.35,13.453 6.35,5.08 ; J5.1@8.001,5.08 6.35,5.08 ; -3.102,1.315 -2.467,1.95 2.54,1.95 ; 2.54,1.95 3.474,1.95 6.35,4.826 6.35,5.08
  Bottom Layer w0.762: R45.1@-67.056,4.101 Q6.2@-65.689,4.101 ; Q6.2@-65.634,4.045 v1(-64.475,4.045) ; v1(-58.093,1.791) -58.093,2.885 -57.29,3.688 R63.1@-55.68,3.688 Q7.2@-54.329,3.688 ; L2.2@-49.784,11.811 -49.022,12.573 v1(-45.72,12.573) v1(-39.751,12.573) ; v1(-46.925,0.824) R7.2@-46.925,3.442 ; R20.1@-3.11,7.665 -3.102,7.657 v1(-3.102,3.601) ; R40.1@0.043,17.521 0.368,17.196 1.27,17.196 ; U4.5@1.34,4.125 2.253,4.125 v1@2.606,4.478 ; R43.2@1.343,19.476 1.343,17.269 1.27,17.196 ; v1@1.938,17.196 1.27,17.196 ; R27.1@6.223,4.199 7.12,4.199 J5.1@8.001,5.08
  other v1: -64.435,11.181 2.159,17.145
A_2.06V: J2.5 J2.6 R67.2 R71.1 TP2.1 | length 8.8
  Top Layer w0.254: TP2.1@-31.233,10.922 -30.734,11.421 -30.734,12.646 ; J2.6@-30.78,13.675 -30.78,12.654 -30.772,12.646 -30.734,12.646 ; -30.734,12.7 -30.734,12.646 ; J2.5@-30.28,13.675 -30.28,12.646 -30.734,12.646
  Bottom Layer w0.254: R71.1@-32.639,10.541 R67.2@-32.639,11.43 -30.734,11.43 -30.353,11.811 v1(-30.353,12.7)
A_2.76V: J2.7 J2.8 R72.2 R73.1 TP3.1 | length 7.4
  Top Layer w0.254: TP3.1@-33.233,10.922 -32.512,10.922 -31.75,11.684 v1@-31.75,12.573 ; J2.8@-31.78,13.675 -31.78,12.603 -31.339,12.603 -31.28,12.662 J2.7@-31.28,13.675
  Bottom Layer w0.254: R73.1@-32.639,13.208 R72.2@-32.639,12.319 -31.75,12.319 v1(-31.496,12.573)
ADAPTER: D2.2 J1.1 Q1.5 Q1.6 Q1.7 Q1.8 Q4.4 Q4.8 R14.2 R15.2 R34.2 R57.2 TP1.1 | length 44.3
  Top Layer w2.54: v1@-24.971,13.129 -24.971,10.668 -21.796,7.493 -14.32,7.493 ; J1.1@-13.33,6.503 -14.32,7.493 ; -12.547,7.467 -12.573,7.493 -13.33,7.493 -14.32,7.493
  Bottom Layer w0.254: -31.354,16.398 Q4.4@-31.354,16.984
  Bottom Layer w0.508: -31.354,16.398 -31.212,16.256 -30.734,16.256 -30.353,16.637 ; Q4.8@-31.196,17.78 -30.48,17.78 -30.353,17.653 -30.353,16.764 ; Q1.5@-14.237,4.901 D2.2@-14.237,6.608 ; Q1.6@-13.587,4.901 -13.587,6.578 ; Q1.7@-12.937,4.901 -12.937,6.412 ; -12.7,6.649 -12.287,6.236 Q1.8@-12.287,4.901
  Bottom Layer w0.635: v1@-11.718,7.03 R15.2@-11.041,7.03
  Bottom Layer w0.762: -30.353,16.637 -30.353,16.764 ; -30.234,17.026 R34.2@-28.956,17.026 ; -25.908,16.51 R57.2@-25.908,17.026 ; R14.2@-15.556,6.649 -12.7,6.649 -12.7,6.671 -12.373,6.998 v1(-12.319,6.998) v1(-11.75,6.998)
  Bottom Layer w1.27: -26.392,15.822 -25.976,16.238
  Bottom Layer w1.524: -30.353,16.637 -30.353,15.494 -29.337,14.478 -26.308,14.478 ; -26.308,15.738 -26.308,14.478 ; -25.146,12.7 -25.463,13.018 -26.308,13.862 -26.308,14.478
  other v1: -12.954,6.998 -24.892,12.319 -25.527,12.954 -24.892,12.954 -25.527,13.716 -24.892,13.716
AGND: C50.2 C51.1 C53.1 D16.2 L3.1 R53.1 R55.2 U10.2 | length 13.5
  Top Layer w0.508: L3.1@-0.508,2.921 0.955,2.921 R53.1@1.27,3.236 ; v1(0.254,5.588) 0.551,5.588 0.77,5.369 C53.1@0.77,4.826 0.77,3.736 R53.1@1.27,3.236 ; C50.2@1.897,8.382 2.54,8.382 2.794,8.636 v1(2.794,9.652) ; C51.1@3.056,2.921 1.585,2.921 R53.1@1.27,3.236 ; v1(3.601,10.205) D16.2@5.133,10.205 5.842,9.496 R55.2@5.842,8.374 ; v1(4.699,5.08) U10.2@5.772,5.08
AW_ADC: C50.1 D15.2 D16.1 R58.2 TP56.1 U6.10 | length 13
  Top Layer w0.508: TP56.1@-1.27,13.843 -1.27,13.208 -1.061,12.999 -0.635,12.999 ; v1(-0.889,12.745) -0.635,12.999 ; D15.2@0.635,12.798 D15.2@0.836,12.999 ; D15.2@0.709,13.126 D15.2@0.836,12.999 ; R58.2@0.897,7.366 0.897,12.938 D15.2@0.836,12.999 ; -0.635,12.999 D15.2@0.836,12.999
  Bottom Layer w0.152: U6.10@-4.434,13.195 U6.10@-4.422,13.183 -1.327,13.183 v1(-0.889,12.745)
AW_LOAD: C2.1 C4.1 C5.1 C58.1 C59.1 D14.2 J2.9 J2.10 J2.11 J2.12 Q12.3 R67.1 R72.1 TP54.1 | length 38.1
  Top Layer w0.254: -33.78,12.7 J2.12@-33.78,13.675 -33.78,15.496 -33.528,15.748 -32.893,15.748 -32.512,15.748 -32.28,15.516 J2.9@-32.28,13.675 ; J2.11@-33.28,13.675 -33.28,15.679 ; J2.10@-32.78,13.675 -32.78,15.734
  Top Layer w0.508: TP54.1@-41.91,16.764 -41.89,16.744 -41.013,16.744 C59.1@-41.013,15.494 C4.1@-41.013,14.351 ; -39.243,17.698 C5.1@-38.535,17.698 C2.1@-37.011,17.698 ; v1(-34.544,11.811) -34.161,11.811 -33.78,12.192 -33.78,12.7
  Top Layer w1.27: Q12.3@-40.742,9.08 -41.151,9.49 -41.151,16.606 -41.013,16.744 C58.1@-40.059,17.698 ; -39.243,17.698 C58.1@-40.059,17.698 ; -32.893,15.748 -32.893,17.018 -33.63,17.755 -37.011,17.755 -40.002,17.755 C58.1@-40.059,17.698
  Bottom Layer w0.508: v1(-34.544,11.811) -34.02,11.811 R67.1@-33.639,11.43 R72.1@-33.639,12.319
AW_OUT: C52.2 R13.2 R58.1 TP53.1 U10.4 | length 6.3
  Top Layer w0.254: TP53.1@1.397,6.096 1.524,5.969 2.418,5.969 ; R58.1@1.897,7.366 2.413,7.366 ; U10.4@3.372,6.03 3.311,5.969 2.418,5.969 ; R13.2@3.683,7.374 R13.2@3.691,7.366 ; C52.2@3.691,8.382 R13.2@3.691,7.366 ; 2.413,7.366 R13.2@3.691,7.366 ; 2.413,7.366 2.418,7.361 2.418,5.969
AW_VCC-: J2.1 J2.2 J2.3 J2.4 R53.2 R54.1 TP31.1 | length 65.7
  Top Layer w0.254: v1(-35.687,11.43) TP31.1@-35.687,12.287 ; v1(-34.29,7.747) -34.29,7.647 -33.959,7.316 -33.959,3.733 -30.62,0.394 -3.372,0.394 -2.002,1.764 1.223,1.764 1.27,1.717 1.458,1.905 R54.1@3.056,1.905 ; v1(-31.623,15.621) -29.78,15.621 ; J2.4@-29.78,13.675 -29.78,15.621 ; J2.3@-29.28,13.675 -29.28,15.621 ; J2.2@-28.78,13.675 -28.78,15.486 ; J2.1@-28.28,13.675 -28.28,14.986 -28.78,15.486 ; -29.78,15.621 -29.28,15.621 ; -29.28,15.621 -28.915,15.621 -28.78,15.486
  Bottom Layer w0.254: v1(-34.29,7.747) -35.687,9.144 v1(-35.687,11.43) -35.687,12.981 -33.047,15.621 v1(-31.623,15.621)
BAT: C22.1 C23.1 C24.1 C66.1 R5.2 TP13.1 U1.7 U3.13 U3.14 | length 74.4
  Top Layer w0.254: -70.6,18.714 -70.666,18.648 -70.666,17.952 -70.396,17.682 U1.7@-69.82,17.682
  Top Layer w1.27: TP13.1@-74.476,19.571 -73.875,20.172 R5.2@-72.063,20.172 -70.605,20.172 -70.6,20.177 ; -70.6,18.714 -70.6,20.177 ; -69.777,21 -70.6,20.177
  Top Layer w2.54: -69.777,21 -69.65,21.127 -61.087,21.127 C66.1@-61.019,21.127 ; C66.1@-61.087,21.195 C66.1@-61.019,21.127 ; v1@-57.544,13.159 -57.712,13.328 -57.712,19.917 -58.922,21.127 C66.1@-61.019,21.127
  Power w0.762: v1(-26.172,3.124) -26.172,3.906
  Power w2.54: v1@-57.356,12.954 -57.356,14.859 -56.874,15.342 -45.141,15.342 -35.349,5.55 -33.045,5.55 -33.02,5.525 ; -33.02,4.526 -33.02,5.525 ; -25.714,4.783 -26.506,5.575 -29.515,5.575 -29.566,5.525 -33.02,5.525
  Bottom Layer w0.254: U3.13@-25.041,2.859 -26.141,2.859 -26.172,2.89 v1(-26.172,3.124) -26.172,3.359 U3.14@-25.041,3.359
  Bottom Layer w0.762: v1@-32.385,3.81 -32.566,3.629 C24.1@-32.566,3.053 -29.955,3.053 C23.1@-29.772,2.87
  other v1: -32.893,3.81 -32.258,3.81 -57.912,12.319 -57.277,12.319 -56.642,12.319 -57.404,12.954 -56.642,12.954 -56.642,13.589 -64.135,21.095 -64.135,21.717 -60.071,21.717 -64.135,22.352 -60.071,22.352
BATTERY: C3.1 R5.1 TP33.1 U1.6 U1.8 Us1.1 | length 44.5
  Top Layer w0.203: R5.1@-72.063,18.272 -71.748,18.272 -70.758,17.282 U1.8@-69.82,17.282
  Top Layer w0.254: U1.6@-65.67,17.682 -65.094,17.682 -64.443,18.333 C3.1@-63.8,18.333 v1(-63.8,19.214)
  Top Layer w1.27: v1(-74.984,16.555) -74.984,17.063 TP33.1@-74.476,17.571 -73.775,18.272 R5.1@-72.063,18.272
  Power w2.54: -74.493,16.555 -72.461,18.587 -68.961,18.587 ; -68.371,12.065 -68.371,12.491 -68.371,17.996 -68.961,18.587 ; v1@-63.834,19.257 -64.503,18.587 -65.828,18.587 -68.961,18.587
  Bottom Layer w2.54: -68.219,12.205 -67.425,12.999 -60.272,12.999 Us1.1@-54.545,18.726
  other v1: -68.253,11.57 -68.761,11.951 -67.618,12.078 -62.411,12.078 -61.649,12.078 -69.215,12.192 -68.38,12.491 -61.649,12.713 -68.888,12.84 -61.649,13.348 -61.649,13.856 -60.887,13.856 -74.93,15.875 -75.438,16.129 -75.438,16.891
BUZZER_IO: R44.2 TP47.1 U6.41 | length 79
  Top Layer w0.203: TP47.1@-70.406,7.633 v1(-66.983,7.633)
  Power w0.152: v1(-66.983,7.633) -66.196,8.42 -66.196,14.703 -59.118,21.781 -26.988,21.781 -25.159,19.952 v1(-17.679,19.952)
  Bottom Layer w0.152: v1(-17.679,19.952) -15.329,22.301 -8.462,22.301 -8.047,21.886 U6.41@-8.047,17.608
  Bottom Layer w0.203: R44.2@-66.983,6.682 v1(-66.983,7.633)
BUZZER_POWER: R65.2 TP48.1 U6.40 | length 81
  Top Layer w0.152: v1@-16.691,19.349 -16.691,20.079 -14.83,21.94 -10.11,21.94 -9.579,21.409 v1(-9.579,21.381)
  Top Layer w0.762: TP48.1@-70.539,5.5 -68.494,5.5 v1@-68.072,5.078
  Power w0.152: v1(-68.072,5.039) -66.802,5.039 -65.84,6.001 -65.84,14.551 -58.966,21.425 -27.14,21.425 -25.064,19.349 v1(-16.818,19.349)
  Bottom Layer w0.152: v1(-9.579,21.381) -8.863,21.381 -8.447,20.965 U6.40@-8.447,17.608
  Bottom Layer w0.762: R65.2@-68.072,4.101 v1(-68.072,5.039)
BUZZER_VCC: R36.1 R42.1 TP51.1 | length 9.5
  Top Layer w0.762: TP51.1@-60.252,12.65 TP51.1@-60.052,12.45 ; v1(-59.998,7.03) TP51.1@-59.998,12.396
  Bottom Layer w0.762: R36.1@-61.468,4.236 R42.1@-61.468,6.022 -60.679,6.022 -59.998,6.703 v1(-59.998,7.03)
CHARGE_O: C56.2 C60.1 C61.1 C62.1 C63.1 F2.2 Q4.1 Q4.2 Q4.5 Q4.6 Q4.7 Q9.1 Q9.2 Q9.5 Q9.6 Q9.7 R48.1 R50.1 R56.2 TP73.1 | length 60.8
  Top Layer w0.762: v1(-37.751,20.415) TP73.1@-37.751,21.463
  Top Layer w1.27: -48.834,19.243 R48.1@-47.625,19.243 ; R48.1@-47.625,19.116 R50.1@-46.04,19.116
  Top Layer w2.54: F2.2@-37.846,14.835 -35.965,14.835 v1@-35.941,14.859
  Power w2.54: v1@-48.577,19.876 -34.798,19.876 ; v1@-35.941,14.732 -34.798,15.875 -34.798,19.876 ; -25.59,17.59 -27.877,19.876 -34.798,19.876
  Bottom Layer w0.152: -24.511,16.954 -24.511,17.018
  Bottom Layer w0.254: -33.528,17.78 -33.528,16.51 -33.274,16.256 -32.131,16.256 -32.004,16.383 Q4.5@-32.004,16.984 ; -32.654,16.271 Q4.6@-32.654,16.984 ; Q4.1@-32.654,18.83 -32.654,19.37 -32.304,19.72 -32.015,19.431 -32.015,18.841 Q4.2@-32.004,18.83 ; Q9.1@-26.069,19.289 -26.069,18.83 -25.98,18.741 -24.837,18.741 -23.622,18.741 -23.495,18.868 -23.495,19.289 ; Q9.2@-26.069,19.939 Q9.7@-25.471,19.939 ; Q9.6@-24.223,19.289 -23.495,19.289 ; Q9.5@-24.223,19.939 -23.495,19.939 -23.495,19.289
  Bottom Layer w0.762: -33.528,17.78 v1(-33.528,19.05) v1(-33.528,19.558) ; -33.401,17.907 Q4.7@-32.329,17.907 ; -32.304,19.72 C56.2@-32.304,20.46 R56.2@-32.304,21.476 ; Q9.7@-25.146,19.614 -25.146,19.05 -24.837,18.741 -24.757,18.661 C63.1@-24.757,18.161 -24.757,17.399 C62.1@-24.757,16.565
  Bottom Layer w1.27: -36.703,20.066 v1(-36.703,20.701) -35.811,21.593 -32.641,21.593
  other v1: -35.941,13.97 -35.941,14.478 -35.306,14.478 -35.941,15.113 -35.306,15.113 -35.941,15.748 -35.306,15.748 -25.019,17.399 -24.511,17.399 -49.149,19.05 -49.149,19.685 -48.641,19.812 -49.149,20.32
D+: R66.1 U3.2 | length 2.3
  Bottom Layer w0.152: U3.2@-21.114,4.859 -19.743,4.859 R66.1@-19.104,5.498
D-: R66.2 U3.3 | length 2.1
  Bottom Layer w0.152: U3.3@-21.114,4.359 U3.3@-21.041,4.359 -20.986,4.414 -19.188,4.414 R66.2@-19.104,4.498
DC/DC_CTRL: R7.1 U2.4 U6.27 | length 56
  Top Layer w0.203: v1(-48.822,5.588) -48.822,8.963 v1(-46.736,11.049)
  Ground w0.152: v1(-44.958,11.557) -43.561,11.557 -40.246,8.242 -35.638,8.242 -34.241,9.639 -18.936,9.639 -18.542,10.033 v1(-18.542,10.414)
  Bottom Layer w0.152: v1(-18.542,10.414) -18.542,9.906 -17.78,9.144 -12.065,9.144 -11.303,9.906 -11.303,12.713 -10.834,13.183 U6.27@-10.472,13.183
  Bottom Layer w0.203: R7.1@-47.925,3.442 -48.314,3.442 -48.822,3.95 v1(-48.822,5.588) -48.813,5.597 U2.4@-44.971,5.597 ; v1(-46.736,11.049) -45.466,11.049 v1(-44.958,11.557)
DC/DC_PG: R6.1 U2.7 U6.18 | length 46.7
  Power w0.152: v1(-27.051,8.255) -25.587,8.255 -24.965,7.633 -9.322,7.633 -7.696,9.259 -7.696,9.262 -7.617,9.341 -5.572,9.341 -5.261,9.03 v1(-5.261,8.554)
  Ground w0.152: v1(-42.218,7.125) -41.812,7.531 -35.343,7.531 -33.972,8.903 -27.699,8.903 v1(-27.051,8.255)
  Bottom Layer w0.152: -43.115,8.141 -42.472,8.141 -42.218,7.887 v1(-42.218,7.125) -42.218,6.744 -42.365,6.597 U2.7@-43.021,6.597 ; U6.18@-7.247,11.558 -7.247,10.309 -6.061,9.123 -5.449,9.123 -5.261,8.935 v1(-5.261,8.554)
DOG_E\N\: R28.1 TP12.1 U4.3 | length 8.2
  Top Layer w0.152: v1(9.271,5.283) 9.271,5.969 TP12.1@9.779,6.477
  Bottom Layer w0.152: U4.3@3.74,2.225 6.148,2.225 8.249,4.326 8.313,4.326 v1(9.271,5.283)
DOG_WDI: U4.4 U6.11 | length 16.1
  Power w0.152: v1(-1.524,5.334) -1.575,5.385 -1.575,10.617 -0.889,11.303 v1(-0.889,11.938)
  Bottom Layer w0.152: U6.11@-4.422,12.783 -1.734,12.783 v1(-0.889,11.938) ; v1(-1.524,5.334) -0.635,5.334 0,4.699 0,2.667 0.442,2.225 U4.4@1.34,2.225
EEPROM_VCC: C44.1 C45.1 R43.1 R46.2 R47.2 U8.8 | length 18.6
  Power w0.762: v1(5.534,21.381) 5.534,19.444 6.806,18.172 v1(6.806,14.362)
  Bottom Layer w0.762: R43.1@1.343,21.127 C44.1@2.87,21.127 4.278,21.127 ; R46.2@2.964,14.362 R47.2@3.98,14.362 v1(6.806,14.362) ; C45.1@4.137,20.266 4.137,20.936 ; 5.28,21.127 4.278,21.127 ; U8.8@6.12,20.079 4.994,20.079 4.137,20.936 ; 4.137,20.936 4.137,20.986 4.278,21.127